# Allegro board IA6141.brd
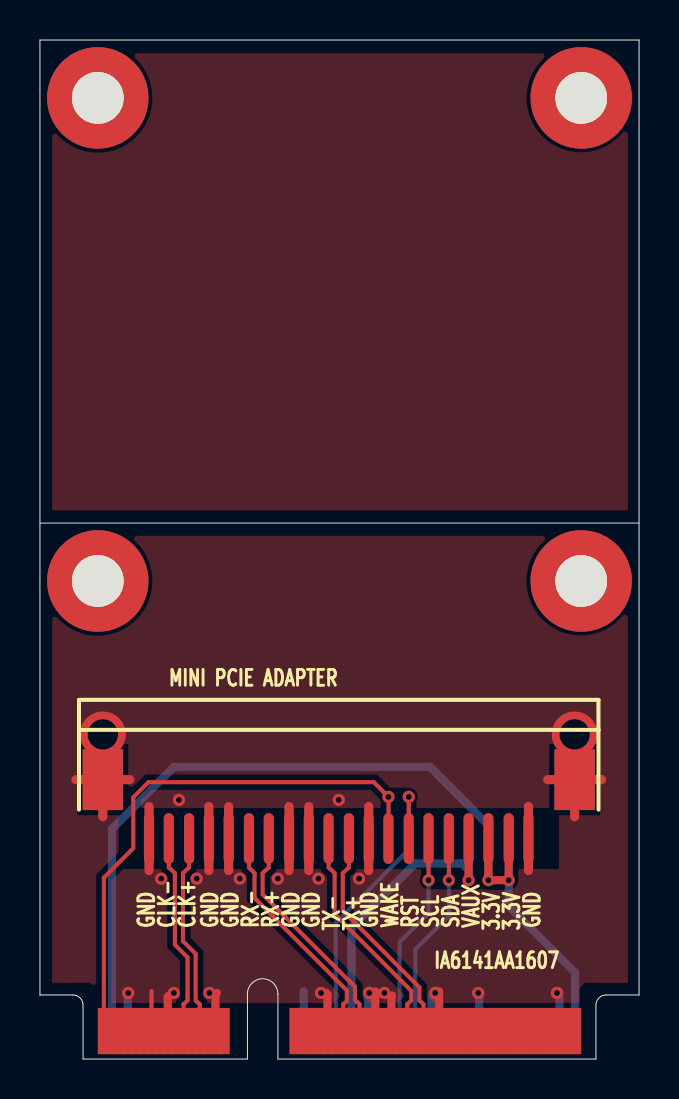
[diagram p0: board, top side]
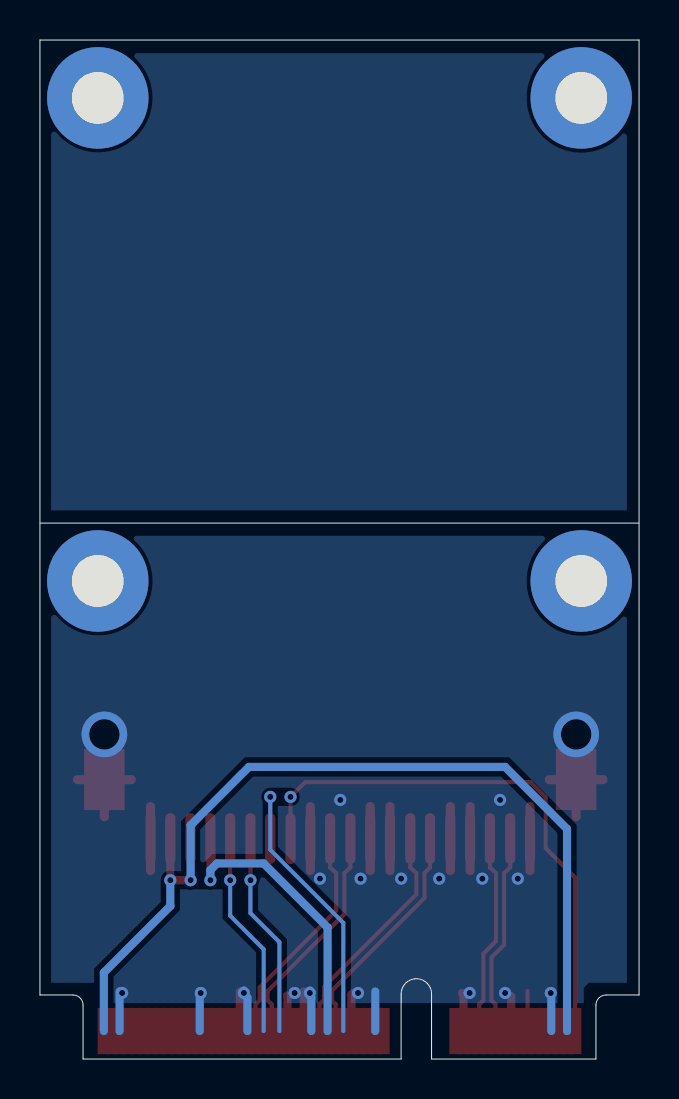
[diagram p1: board, bottom side, seen from below]

Outline 30 x 50.95 mm; copper layers: TOP, BOTTOM. Coordinates in mm from the lower left corner of the outline.

## Design rules (mm)
net group PER0: nets PER0N PER0P
net group PET0: nets PET0N PET0P
net group REFCLK: nets REFCLKN REFCLKP

## Placement (name value [footprint] x y rotation side)
J1  FPC 1.0mm 20P  [FPC-1R0-20]  14.96 13.97 180 top
J3  MINI PCIE FORM FACTOR  [MINI_PCIE_DUAL]  11.15 0 0 top

## Library data of the parts
J1 = FPC CONN 20
J3 = CONN PLUG 26x2

## Footprints (pads in the part's own frame, mm; a bottom-side part is the same pattern mirrored in y, then rotated)
FPC-1R0-20
  oval 0.508x2.54 smd: 1(-9.5,2.946) 2(-8.509,2.946) 3(-7.493,2.946) 4(-6.502,2.946) 5(-5.512,2.946) 6(-4.496,2.946) 7(-3.505,2.946) 8(-2.489,2.946) 9(-1.499,2.946) 10(-0.508,2.946) 11(0.508,2.946) 12(1.499,2.946) 13(2.489,2.946) 14(3.505,2.946) 15(4.496,2.946) 16(5.512,2.946) 17(6.502,2.946) 18(7.493,2.946) 19(8.509,2.946) 20(9.5,2.946)
  rect 2.032x3.048 smd: 21(-11.811,0) 22(11.811,0)
MINI_PCIE_DUAL
  round 5.08 hole 2.591: (-8.255,48.057) (-8.255,23.901) (15.951,48.057) (15.951,23.901)
  rect 0.61x2.311 smd: 1(-7.95,1.397) 2(-7.544,1.397) 3(-7.163,1.397) 4(-6.756,1.397) 5(-6.35,1.397) 6(-5.944,1.397) 7(-5.537,1.397) 8(-5.156,1.397) 9(-4.75,1.397) 10(-4.343,1.397) 11(-3.962,1.397) 12(-3.556,1.397) 13(-3.15,1.397) 14(-2.743,1.397) 15(-2.362,1.397) 16(-1.956,1.397) 17(1.651,1.397) 18(2.057,1.397) 19(2.438,1.397) 20(2.845,1.397) 21(3.251,1.397) 22(3.658,1.397) 23(4.039,1.397) 24(4.445,1.397) 25(4.851,1.397) 26(5.258,1.397) 27(5.639,1.397) 28(6.045,1.397) 29(6.452,1.397) 30(6.858,1.397) 31(7.239,1.397) 32(7.645,1.397) 33(8.052,1.397) 34(8.458,1.397) 35(8.839,1.397) 36(9.246,1.397) 37(9.652,1.397) 38(10.058,1.397) 39(10.439,1.397) 40(10.846,1.397) 41(11.252,1.397) 42(11.659,1.397) 43(12.04,1.397) 44(12.446,1.397) 45(12.852,1.397) 46(13.259,1.397) 47(13.64,1.397) 48(14.046,1.397) 49(14.453,1.397) 50(14.859,1.397) 51(15.24,1.397) 52(15.646,1.397)

## Nets
+3.3V: J1.2 J1.3 J3.2 J3.52
+3.3VAUX: J1.4 J3.24
GND: J1.1 J1.9 J1.12 J1.13 J1.16 J1.17 J1.20 J1.21(S1) J1.22(S2) J3.4 J3.7 J3.9 J3.15 J3.18 J3.21 J3.26 J3.27 J3.29 J3.34 J3.35 J3.40 J3.50
PER0N: J1.15 J3.23
PER0P: J1.14 J3.25
PERST#: J1.7 J3.22
PET0N: J1.11 J3.31
PET0P: J1.10 J3.33
REFCLKN: J1.19 J3.11
REFCLKP: J1.18 J3.13
SMB_CLK: J1.6 J3.30
SMB_DATA: J1.5 J3.32
WAKE#: J1.8 J3.1

Pads without a net: J3 3 5 6 8 10 12 14 16 17 19 20 28 36 37 38 39 41 42 43 44 45 46 47 48 49 51

## Via types
v1: diameter 0.61, hole 0.305, TOP to BOTTOM, 24 vias
v2: diameter 2.286, hole 1.524, TOP to BOTTOM, 2 vias

## Routing (per net, layer and track width the routed paths; a pad name or vN(x,y) marks a point on that pad's centre or on a via; arc(x,y) is an arc through that point)
+3.3V: length 48.3
  TOP w0.406: J1.3 v1(22.45,8.94) v1(23.47,8.94) J1.2
  BOTTOM w0.406: v1(23.47,8.94) 23.47,7.65 26.8,4.32 J3.52 ; J3.2 3.61,11.51 6.71,14.61 19.53,14.61 22.45,11.68 v1(22.45,8.94)
+3.3VAUX: length 15.1
  TOP w0.406: J1.4 v1(21.46,8.94)
  BOTTOM w0.406: J3.24 15.6,6.58 18.8,9.78 21.13,9.78 21.46,9.45 v1(21.46,8.94)
GND: length 61.6
  TOP w0.203: 5.59,3.4 5.59,1.4 J3.7 ; J1.21 v2(26.77,16.23) ; J1.22 v2(3.15,16.23)
  TOP w0.406: J3.9 6.4,3.12 6.45,3.17 ; 17.63,3.17 17.6,3.15 J3.29 ; J3.27 16.79,3.38 ; 14.33,3.3 14.4,3.23 J3.21 ; J3.15 8.79,3.23 8.86,3.3 ; J3.35 19.99,3.38
  TOP w0.457: 8.46,9.42 J1.17 8.46,12.62 ; 12.47,12.62 J1.13 12.47,9.42 ; J1.21 28.12,13.97 ; J1.21 26.77,12.12 ; J1.21 25.43,13.97 ; J1.22 4.5,13.97 ; J1.22 3.15,12.12 ; J1.22 1.8,13.97 ; 9.45,12.62 J1.16 9.45,9.42 ; 5.46,9.42 J1.20 5.46,12.62 ; 24.46,9.42 J1.1 24.46,12.62 ; 16.46,9.42 J1.9 16.46,12.62 ; 13.46,12.62 J1.12 13.46,9.42
  BOTTOM w0.406: J3.4 4.39,3.38 ; 19.79,3.43 v1(19.79,3.3) 19.79,3.25 19.61,3.07 J3.34 ; J3.50 26.01,3.38 ; J3.26 16.41,3.07 16.48,3.15 v1(16.48,3.3) 16.48,3.43 ; J3.18 13.21,3.38 ; J3.40 22,3.38
  vias: v1(4.42,3.3) v1(6.07,9.02) v1(6.71,3.3) v1(6.96,12.95) v1(7.85,9.02) v1(8.48,3.3) v1(10.01,9.02) v1(11.91,9.02) v1(13.94,9.02) v1(14.07,3.3) v1(14.96,12.95) v1(15.98,9.02) v1(17.25,3.3) v1(21.95,3.3) v1(25.88,3.3)
PER0N: length 11.7
  TOP w0.203: J1.15 10.46,9.58 10.74,9.3 10.74,8.05 15.37,3.43 15.37,2.9 15.19,2.74 J3.23
PER0P: length 11.8
  TOP w0.203: J3.25 16,2.74 15.8,2.92 15.77,2.95 15.77,3.61 11.15,8.23 11.15,9.3 11.46,9.58 J1.14
PERST#: length 15.3
  TOP w0.203: J1.7 v1(18.47,13.11)
  BOTTOM w0.203: v1(18.47,13.11) 18.47,10.46 14.81,6.81 J3.22
PET0N: length 11.4
  TOP w0.203: J1.11 14.45,9.58 14.76,9.3 14.76,7.24 18.59,3.4 18.59,2.92 18.39,2.74 J3.31
PET0P: length 11.4
  TOP w0.203: J1.10 15.47,9.58 15.16,9.3 15.16,7.42 19,3.58 19,2.92 19.2,2.74 J3.33
REFCLKN: length 10.1
  TOP w0.203: J3.11 7.19,2.74 7.39,2.92 7.39,5.08 6.76,5.71 6.76,9.3 6.45,9.58 J1.19
REFCLKP: length 10.1
  TOP w0.203: J1.18 7.47,9.58 7.16,9.3 7.16,5.89 7.8,5.26 7.8,2.92 8,2.74 8,1.4
SMB_CLK: length 10.2
  TOP w0.203: J1.6 v1(19.46,8.94)
  BOTTOM w0.203: J3.30 18.01,5.84 19.46,7.29 v1(19.46,8.94)
SMB_DATA: length 10.3
  TOP w0.203: J1.5 v1(20.47,8.94)
  BOTTOM w0.203: J3.32 18.8,5.49 20.47,7.16 v1(20.47,8.94)
WAKE#: length 27.8
  TOP w0.203: J3.1 3.2,9.07 4.67,10.54 4.67,13.08 5.44,13.84 16.71,13.84 v1(17.45,13.11) J1.8

## Copper pours and planes (outline as drawn; the poured copper is in the pictures)
GND on TOP, BOTTOM: 0.61,3.81 0.61,26.16 29.44,26.16 29.44,3.81 27.28,3.81 27.03,3.56 27.03,2.79 2.77,2.79 2.77,3.56 2.51,3.81
Net_1 on TOP: 0.61,50.29 0.61,27.43 29.44,27.43 29.44,50.29
Net_2 on BOTTOM: 0.61,50.29 0.61,27.43 29.44,27.43 29.44,50.29

## Text on the board
Ref Des/Silkscreen Top: MINI PCIE ADAPTER | IA6141AA1607 | GND | CLK- | CLK+ | RX- | RX+ | TX- | TX+ | WAKE | RST | SCL | SDA | VAUX | 3.3V
DIMENSION: EDGE TOOLING | V-CUT- | FIGURE | SIZE | 12.0 | 60.0 | 102.0 | DRILL CHART: TOP to BOTTOM | ALL UNITS ARE IN MILS | PLATED | QTY | 24 | 2 | 4
